# Altium PCB EMI-11-AF-002_IdtMcuV1.PcbDoc (part 1 of 2)
Units mm, origin at the board's own origin, x right, y up, seen from the top; angles counter-clockwise.
Board outline 22 x 20.01 mm, 4 copper layers (Top, Signal 1, Signal 2, Bottom), stack 1.02 mm thick; 56 components, 40 nets, 164 pads, 99 vias.
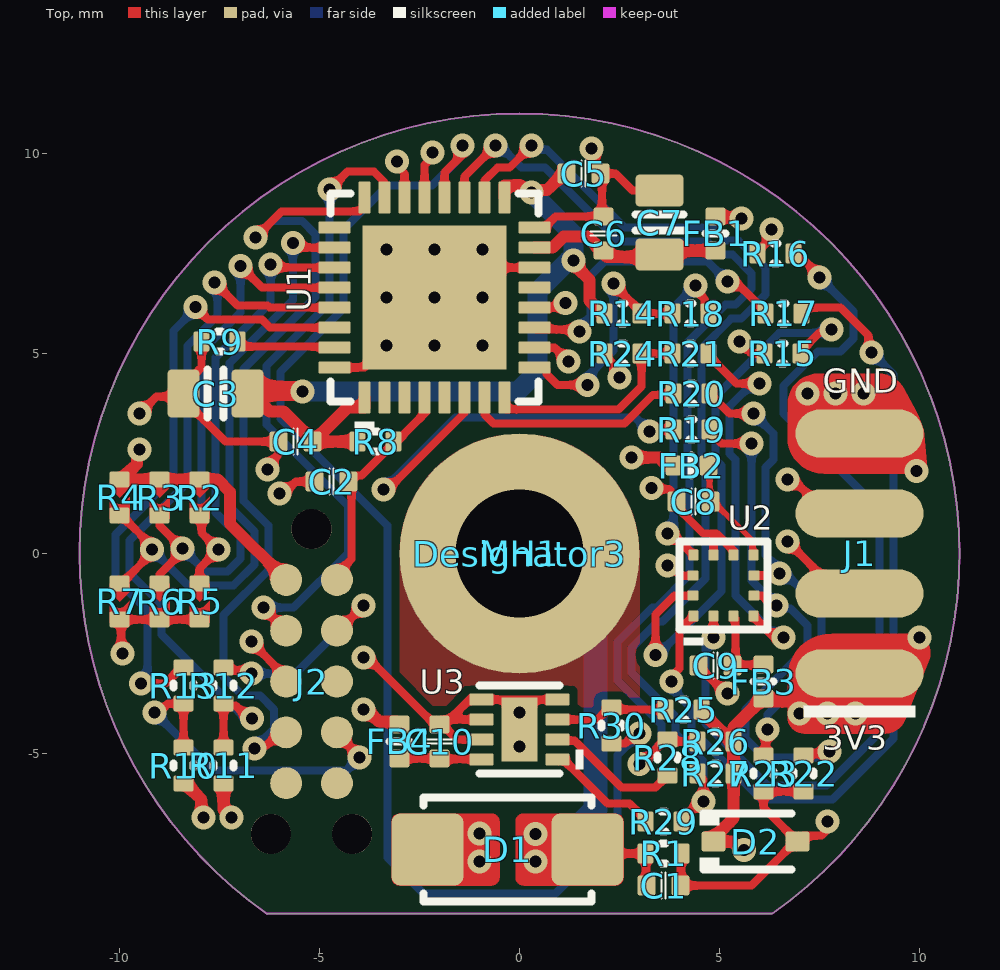
[diagram p0: Top view]
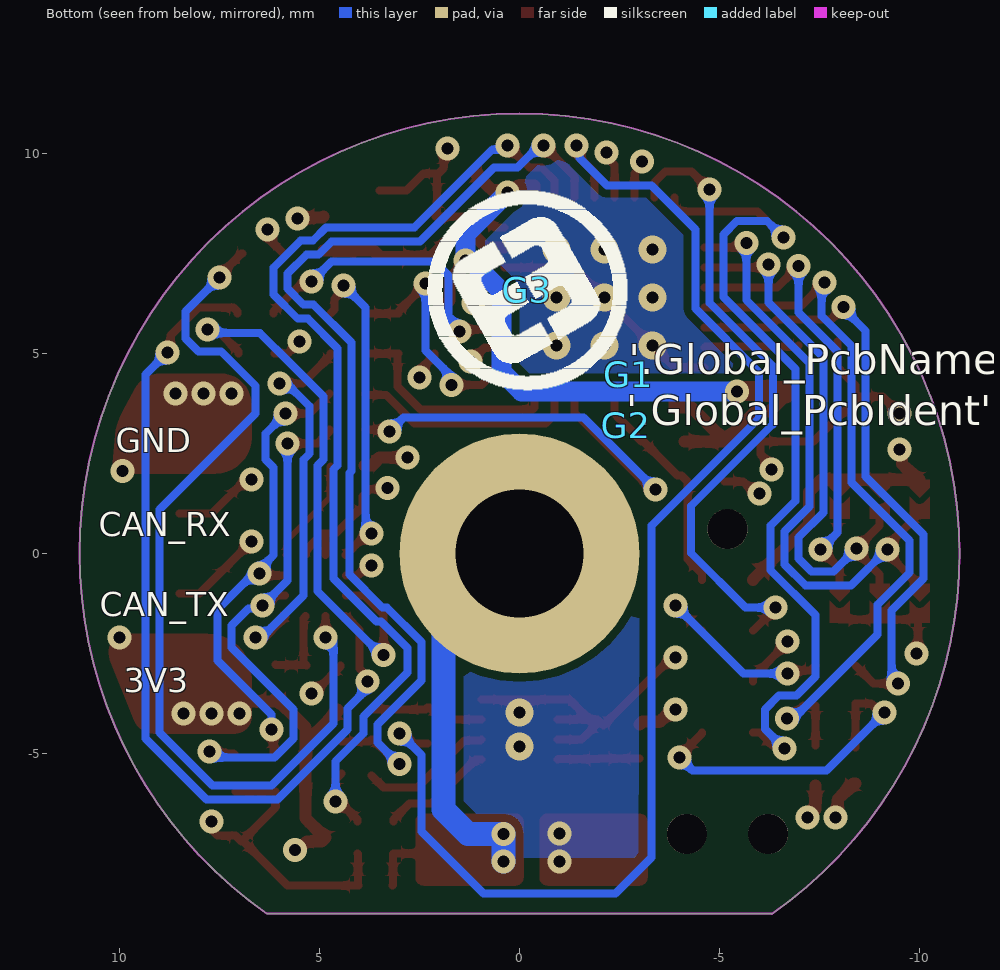
[diagram p1: Bottom view, seen from below]
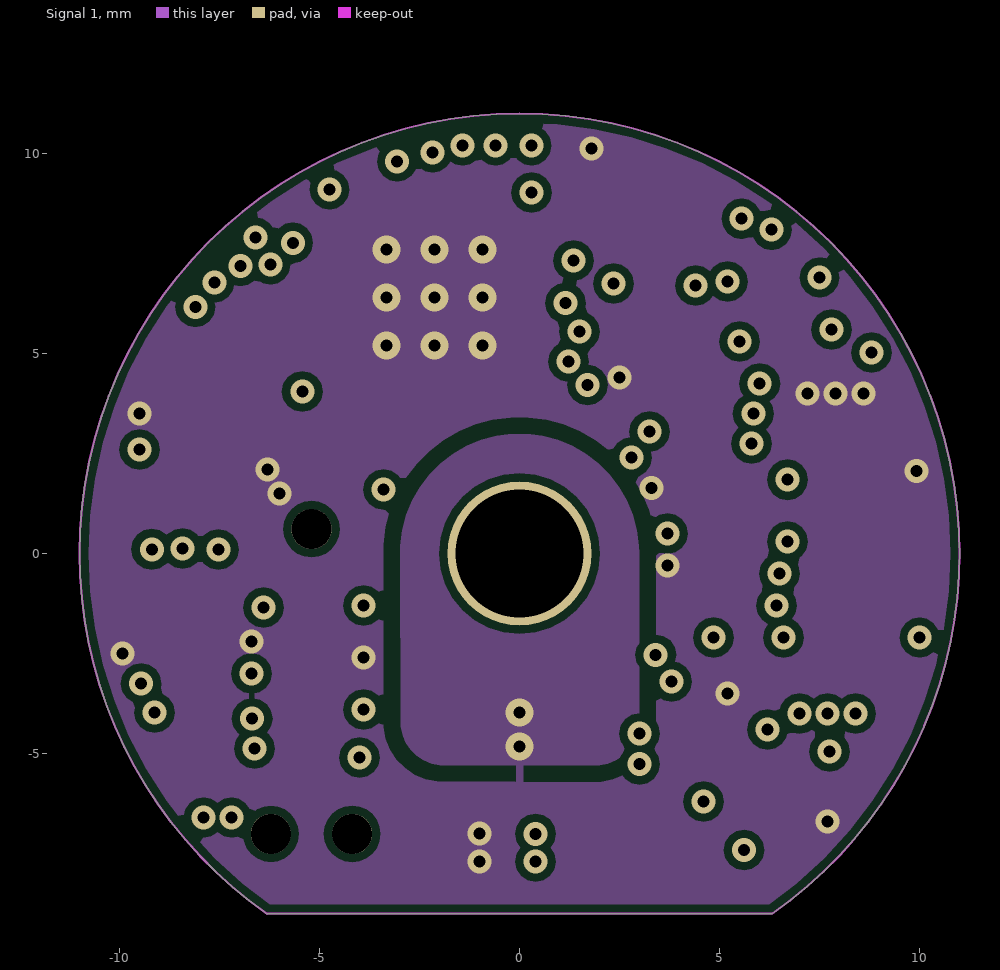
[diagram p2: Signal 1]
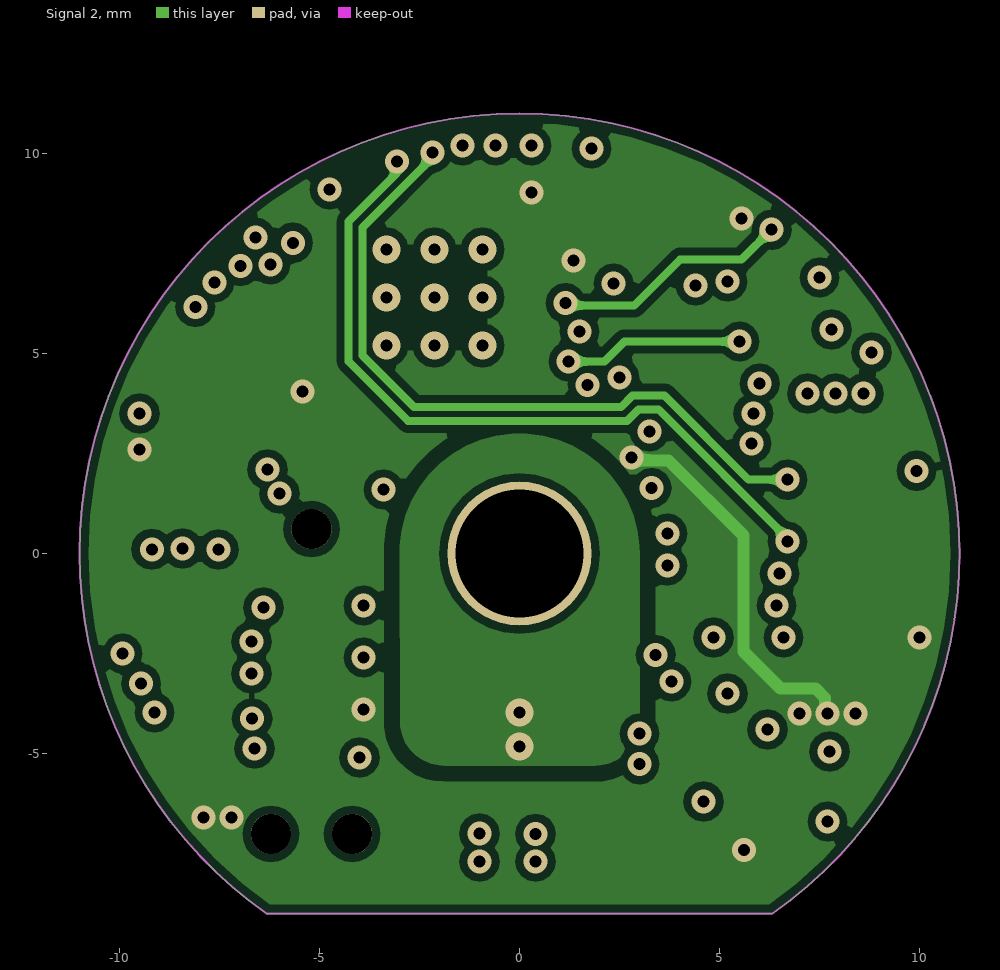
[diagram p3: Signal 2]
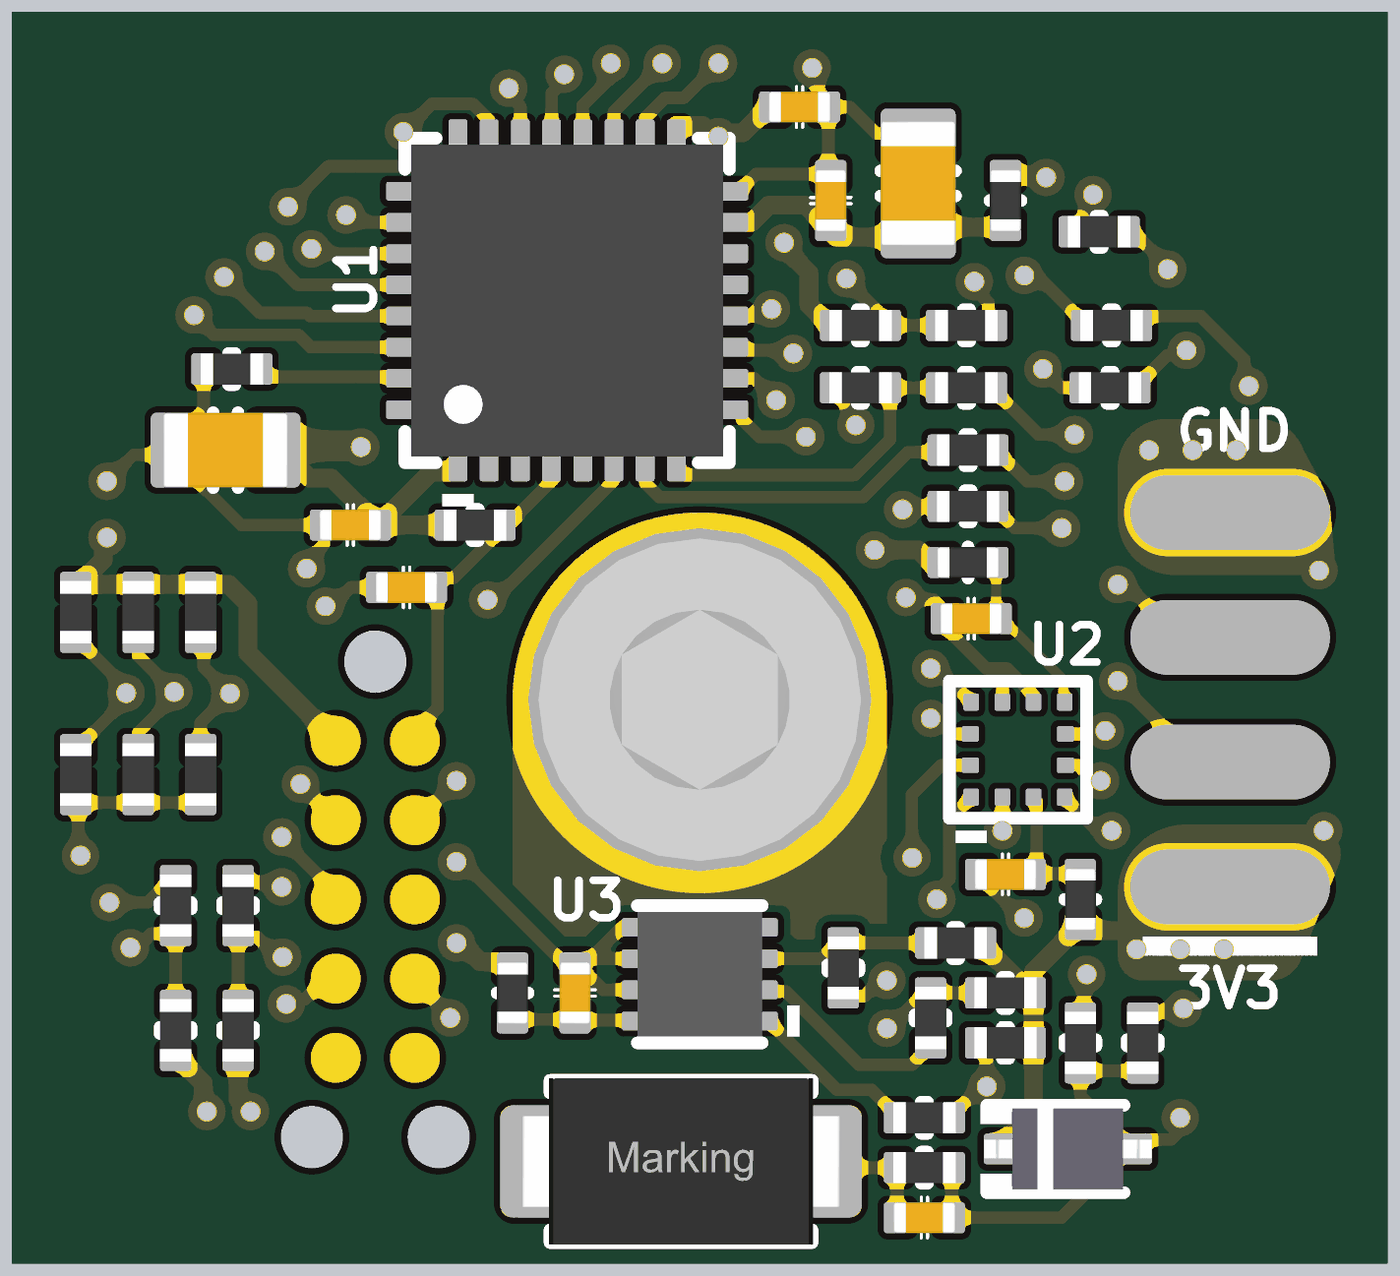
[diagram p4: 3D render of the assembled board from above, using the file's embedded part models]

## Layer stack, top to bottom
Top Solder: solder mask 0.01, Dk 3.5
Top: signal copper 0.035
Dielectric 1: prepreg 0.175, Dk 4.29
Signal 1: signal copper 0.035
Dielectric 2: core 0.53, Dk 3.96
Signal 2: signal copper 0.035
Dielectric 3: prepreg 0.175, Dk 4.29
Bottom: signal copper 0.035
Bottom Solder: solder mask 0.01, Dk 3.5

## Board outline
-11,0 ccw(c0,0) -6.308,-9.012 -6.308,-9 6.324,-9 ccw(c0,0) 11,0 ccw(c0,0)

## Design rules (kind name [scope] priority, off if disabled: settings)
AssemblyTestPointUsage [All] p1 off:
AssemblyTestpoint [All] p1 off: testpointundercomponent=TRUE minsize=1.016 maxsize=2.54 preferedsize=1.524 minholesize=0 maxholesize=1.016 preferedholesize=0.813 testpointgrid=0.025 usegrid=TRUE gridtolerance=0 allowsidetop=TRUE allowsidebottom=TRUE
BoardOutlineClearance [All] p1: gap=0.2 ignorepadtopadclearanceinfootprint=FALSE
Clearance Clearance_Polygon [InPolygon] p1: gap=0.2 ignorepadtopadclearanceinfootprint=FALSE
Clearance [All] p2: gap=0.15 ignorepadtopadclearanceinfootprint=FALSE
ComponentClearance [All] p1 off: gap=0 collisioncheckmode=3 verticalgap=0 showdistances=FALSE
DiffPairsRouting [All] p1: maxlimit=0.15 minlimit=0.15 mostfreqgap=0.15 toplayer_minwidth=0.15 toplayer_maxwidth=0.15 toplayer_prefwidth=0.15 midlayer1_minwidth=0.15 midlayer1_maxwidth=0.15 midlayer1_prefwidth=0.15 midlayer2_minwidth=0.15 midlayer2_maxwidth=0.15 midlayer2_prefwidth=0.15 bottomlayer_minwidth=0.15 bottomlayer_maxwidth=0.15 bottomlayer_prefwidth=0.15 maxuncoupledlength=10
FabricationTestPointUsage [All] p1 off: valid=0 allowmultiple=FALSE
FabricationTestpoint [All] p1 off: side=3 testpointundercomponent=TRUE minsize=1.016 maxsize=2.54 preferedsize=1.524 minholesize=0 maxholesize=1.016 preferedholesize=0.813 testpointgrid=0.025 allowsidetop=TRUE allowsidebottom=TRUE usegrid=TRUE gridtolerance=0
FanoutControl Fanout_BGA [IsBGA] p1 off: bgadir=Out bgaviamode=Centered fanoutstyle=Auto fanoutdirection=Alternating viagrid=0.025 // Fanout_BGA (Default Rule)
FanoutControl Fanout_LCC [IsLCC] p2 off: bgadir=Out bgaviamode=Centered fanoutstyle=Auto fanoutdirection=Alternating viagrid=0.025 // Fanout_LCC (Default Rule)
FanoutControl Fanout_SOIC [IsSOIC] p3 off: bgadir=Out bgaviamode=Centered fanoutstyle=Auto fanoutdirection=Alternating viagrid=0.025 // Fanout_SOIC (Default Rule)
FanoutControl Fanout_Small [(CompPinCount < 5)] p4 off: bgadir=Out bgaviamode=Centered fanoutstyle=Auto fanoutdirection=OutThenIn viagrid=0.025 // Fanout_Small (Default Rule)
FanoutControl Fanout_Default [All] p5 off: bgadir=Out bgaviamode=Centered fanoutstyle=Auto fanoutdirection=Alternating viagrid=0.025 // Fanout_Default (Default Rule)
Height [All] p1 off: minheight=0 maxheight=0 prefheight=0
HoleSize [All] p1: absolutevalues=TRUE maxlimit=100 minlimit=0.3 maxpercent=80.000 minpercent=20.000
HoleToHoleClearance [All] p1: gap=0.3 allowstackedmicrovias=TRUE
MinimumAnnularRing [All] p1: minimumring=0.15
MinimumSolderMaskSliver [All] p1: minsoldermaskwidth=0
PlaneClearance [All] p1: clearance=0.2
PlaneConnect [All] p1: planeconnectstyle=Direct reliefexpansion=0.508 reliefentries=4 reliefconductorwidth=0.254 reliefairgap=0.254
PolygonConnect [All] p1: connectstyle=Direct reliefconductorwidth=0.254 reliefentries=4 polygonreliefangle="90 Angle" airgapwidth=0.254
RoutingCorners [All] p1 off: cornerstyle=45-Degree minsetback=0 maxsetback=0
RoutingVias [All] p1: holewidth=0.3 width=0.6 viastyle="Through Hole" minholewidth=0.3 minwidth=0.6 maxholewidth=0.6 maxwidth=1
SilkToSilkClearance [All] p1: silktosilkclearance=0
SilkToSolderMaskClearance [IsPad] p1: minsilkscreentomaskgap=0 clearancetoexposedcopper=TRUE
SolderMaskExpansion [All] p1: expansion=0.1
Width [All] p1: maxlimit=10 minlimit=0.15 preferedwidth=0.4
10 further rules are at their usual default settings.

## Classes and differential pairs
component class SH2: C8 C9 C10 FB2 FB3 FB4 R14 R15 R16 R17 R18 R19 R20 R21 R22 R23 R24 R25 R26 R27 R28 R29 R30 U2 U3
component class SH1: C2 C3 C4 C5 C6 C7 D2 FB1 J1 J2 R2 R3 R4 R5 R6 R7 R8 R9 R10 R11 R12 R13 U1
component class 0_BlkDiag: C1 D1 G1 G2 G3 MH1 R1

## Components (designator, comment, footprint, x,y, rotation, side; value= is the part's Value field where it differs from the comment)
C1 "CC0402KRX7R9BB103" CAP_0402_L 3.6,-8.3 r180 top
C2 "CC0402KRX7R7BB104" CAP_0402_L -4.7,1.8 r180 top
C3 "CC0805KKX7R6BB106" CAP_0805_L -7.6,4 r180 top
C4 "CC0402KRX7R7BB104" CAP_0402_L -5.6,2.8 r180 top
C5 "CC0402KRX7R7BB104" CAP_0402_L 1.6,9.5 r0 top
C6 "CC0402KRX7R7BB104" CAP_0402_L 2.1,8 r90 top
C7 "CC0805KKX7R6BB106" CAP_0805_L 3.5,8.275 r90 top
C8 "CC0402KRX7R7BB104" CAP_0402_L 4.35,1.299 r180 top
C9 "CC0402KRX7R7BB104" CAP_0402_L 4.9,-2.8 r180 top
C10 "CC0402KRX7R7BB104" CAP_0402_L -2,-4.7 r90 top
D1 "824501301" DIONM510X270_SMA_DO-214AC_L -0.3,-7.4 r0 top
D2 "DDZ3V6ASF-7" SOD170X130_SOD-323_SC-76 5.9,-7.2 r0 top
Designator3 "Comment" MECH-SCR_M3X0.6mm 0,0 r0 top
FB1 "7427927291" BEAD_0402_L 4.9,8 r90 top
FB2 "7427927291" BEAD_0402_L 4.3,2.2 r180 top
FB3 "7427927291" BEAD_0402_L 6.1,-3.2 r270 top
FB4 "7427927291" BEAD_0402_L -3,-4.7 r90 top
G1 "/" GRAPH_PCB_NAME_0.75MM_STROKE -2.733,4.48 r180 bottom
G2 "/" GRAPH_PCB_IDENT_0.75MM_STROKE -2.663,3.213 r180 bottom
G3 "/" GRAPH_EMITTER_5MM -0.194,6.596 r180 bottom
J1 "/" CONN-FLAT_2.00MM_1X4_SMD_320X120 8.5,0 r90 top
J2 "TC2050-NL" CONN-TAG_CONNECT_TC2050-NL -5.2,-3.2 r270 top
MH1 "/" PS-MH_C600H320 0,0 r0 top
R1 "RES 0402" RES_0402_L 3.6,-7.5 r180 top
R2 "RC0402JR-070RL" RES_0402_JP_L -8,1.4 r270 top
R3 "RC0402JR-070RL" RES_0402_JP_L -9,1.4 r270 top
R4 "RC0402JR-070RL" RES_0402_JP_L -10,1.4 r270 top
R5 "RC0402JR-070RL" RES_0402_JP_L -8,-1.2 r270 top
R6 "RC0402JR-070RL" RES_0402_JP_L -9,-1.2 r270 top
R7 "RC0402JR-070RL" RES_0402_JP_L -10,-1.2 r270 top
R8 "RC0402JR-0710KL" RES_0402_L -3.6,2.8 r0 top
R9 "RC0402JR-0710KL" RES_0402_L -7.5,5.3 r180 top
R10 "RC0402JR-0710KL" RES_0402_L -8.4,-5.3 r90 top
R11 "RC0402JR-0710KL" RES_0402_L -7.4,-5.3 r90 top
R12 "RC0402JR-071KL" RES_0402_L -7.4,-3.3 r270 top
R13 "RC0402JR-071KL" RES_0402_L -8.4,-3.3 r90 top
R14 "RC0402JR-0710KL" RES_0402_L 2.575,6 r0 top
R15 "RC0402JR-07100RL" RES_0402_L 6.575,5 r180 top
R16 "RC0402JR-07100RL" RES_0402_L 6.4,7.5 r180 top
R17 "RC0402JR-07100RL" RES_0402_L 6.6,6 r180 top
R18 "RC0402JR-071KL" RES_0402_L 4.275,6 r180 top
R19 "RC0402JR-071KL" RES_0402_L 4.3,3.1 r180 top
R20 "RC0402JR-071KL" RES_0402_L 4.3,4 r180 top
R21 "RC0402JR-071KL" RES_0402_L 4.275,5 r180 top
R22 "RC0402JR-0710KL" RES_0402_L 7.1,-5.5 r270 top
R23 "RC0402JR-0710KL" RES_0402_L 6.1,-5.5 r270 top
R24 "RC0402JR-0710KL" RES_0402_L 2.575,5 r180 top
R25 "RC0402JR-0710KL" RES_0402_L 4.1,-3.9 r180 top
R26 "RC0402JR-071KL" RES_0402_L 4.9,-4.7 r180 top
R27 "RC0402JR-071KL" RES_0402_L 4.9,-5.5 r180 top
R28 "RC0402JR-07100RL" RES_0402_L 3.7,-5.1 r90 top
R29 "RC0402JR-07100RL" RES_0402_L 3.6,-6.7 r0 top
R30 "RC0402JR-071KL" RES_0402_L 2.3,-4.3 r270 top
U1 "STM32G431KBU3" QFN33P50_500X500T360X360 -2.125,6.4 r90 top
U2 "KX132-1211" PQFN12P50_200X200 5.1,-0.8 r90 top
U3 "TMP1075DSGR" SON9P50_200X200T160X90 0,-4.4 r180 top

## Footprints (in the part's own frame and the unit in brackets; to place one, negate y for a bottom-side part, rotate by r counter-clockwise, add the part's x,y. Pads: shape width x height; smd on the part's side, far side on the other; paste and mask are expansions set on the pad)
BEAD_0402_L [mm] "Auralix - GH, 29.04.2021"
  rrect25% 0.45x0.5 smd: 1(-0.425,0) 2(0.425,0)
  Top pour cut-out: 0.3,-0.15 0.3,0.15 0.1,0.35 -0.1,0.35 -0.3,0.15 -0.3,-0.15 -0.1,-0.35 0.1,-0.35
  silkscreen extent 0,-0.25 0,0.25, body extent -0.5,-0.25 0.5,0.25, height 0.5
CAP_0402_L [mm] "Auralix - GH, 29.04.2021"
  rrect25% 0.45x0.5 smd: 1(-0.425,0) 2(0.425,0)
  Top pour cut-out: 0.3,-0.15 0.3,0.15 0.1,0.35 -0.1,0.35 -0.3,0.15 -0.3,-0.15 -0.1,-0.35 0.1,-0.35
  silkscreen extent -0.05,-0.33 0.05,0.33, body extent -0.5,-0.25 0.5,0.25, height 0.5
CAP_0805_L [mm] "RESC2012 - GH, 03.05.2021"
  rrect25% 0.8x1.2 smd: 1(-0.8,0) 2(0.8,0)
  Top pour cut-out: 0.5,-0.5 0.5,0.5 0.3,0.7 -0.3,0.7 -0.5,0.5 -0.5,-0.5 -0.3,-0.7 0.3,-0.7
  silkscreen extent -0.2,-0.6 0.2,0.6, body extent -1,-0.6 1,0.6, height 1.24
CONN-FLAT_2.00MM_1X4_SMD_320X120 [mm] "RRR04200K0030 - GH, 17.03.2021"
  oval 1.2x3.2 smd: 1(-3,0) 2(-1,0) 3(1,0) 4(3,0)
  silkscreen extent -4.1,-1.4 -3.8,1.4
CONN-TAG_CONNECT_TC2050-NL [mm] "TC2050-NL - TV, 23.7.2018"
  round 1 hole 1 unplated paste+0: 0(-3.81,0) 0(3.81,-1.016) 0(3.81,1.016)
  round 0.8 smd paste-10: 1(-2.54,-0.635) 2(-1.27,-0.635) 3(0,-0.635) 4(1.27,-0.635) 5(2.54,-0.635) 6(2.54,0.635) 7(1.27,0.635) 8(0,0.635) 9(-1.27,0.635) 10(-2.54,0.635)
  Top pour cut-out: -3.005,-1.295 3.005,-1.295 3.08,-1.28 3.143,-1.238 3.185,-1.175 3.2,-1.1 3.2,-1.1 3.2,1.1 3.173,1.2 3.1,1.273 3,1.3 3,1.3 -3,1.3 -3.077,1.285 -3.141,1.241 -3.185,1.177 -3.2,1.1 -3.2,1.1 -3.2,-1.1 -3.185,-1.175 -3.143,-1.238 -3.08,-1.28 -3.005,-1.295
DIONM510X270_SMA_DO-214AC_L [mm] "824501301 - GH, 04.05.2021"
  rrect25% 1.8x1.8 smd: 1(-2,0) 2(2,0)
  silkscreen extent -2.1,-1.3 2.1,1.3, body extent -2.56,-1.33 2.56,1.34, height 2.2
GRAPH_EMITTER_5MM [mm] "Emitter - TV, 2.11.2018"
  silkscreen extent -2.5,-2.52 2.5,2.46
GRAPH_PCB_IDENT_0.75MM_STROKE [mm] "Tomaz Vidovic, 16.4.2019"
GRAPH_PCB_NAME_0.75MM_STROKE [mm] "Tomaz Vidovic, 16.4.2019"
MECH-SCR_M3X0.6mm [mm] "MECH-SCR_M3X0.6mm - GH, 18.03.2021"
  body extent -2.75,-2.75 2.75,2.75, height 3
PQFN12P50_200X200 [mm] "KX132-1211 - GH, 20.11.2020"
  rrect25% 0.275x0.25 smd: 1(-0.763,0.75) 2(-0.763,0.25) 3(-0.763,-0.25) 4(-0.763,-0.75) 7(0.763,-0.75) 8(0.763,-0.25) 9(0.763,0.25) 10(0.763,0.75)
  rrect25% 0.25x0.275 smd: 5(-0.25,-0.763) 6(0.25,-0.763) 11(0.25,0.763) 12(-0.25,0.763)
  Top pour cut-out: 1.1,1 1.1,-1 1.087,-1.05 1.05,-1.087 1,-1.1 1,-1.1 -1,-1.1 -1.038,-1.092 -1.071,-1.071 -1.092,-1.038 -1.1,-1 -1.1,-1 -1.1,1 -1.087,1.05 -1.05,1.087 -1,1.1 -1,1.1 1,1.1 1.038,1.092 1.071,1.071 1.092,1.038 1.1,1
  silkscreen extent -1.5,-1.1 1.1,1.1, body extent -1,-1 1,1, height 1.01
PS-MH_C600H320 [mm] "Auralix - GH, 19.03.2021"
  round 6 / inner round 3.6 / far side round 6 hole 3.2: 1(0,0)
QFN33P50_500X500T360X360 [mm] "CC1200 - TV, 26.9.2017"
  rrect25% 0.8x0.3 smd: 1(-2.5,1.75) 2(-2.5,1.25) 3(-2.5,0.75) 4(-2.5,0.25) 5(-2.5,-0.25) 6(-2.5,-0.75) 7(-2.5,-1.25) 8(-2.5,-1.75) 17(2.5,-1.75) 18(2.5,-1.25) 19(2.5,-0.75) 20(2.5,-0.25) 21(2.5,0.25) 22(2.5,0.75) 23(2.5,1.25) 24(2.5,1.75)
  rrect25% 0.3x0.8 smd: 9(-1.75,-2.5) 10(-1.25,-2.5) 11(-0.75,-2.5) 12(-0.25,-2.5) 13(0.25,-2.5) 14(0.75,-2.5) 15(1.25,-2.5) 16(1.75,-2.5) 25(1.75,2.5) 26(1.25,2.5) 27(0.75,2.5) 28(0.25,2.5) 29(-0.25,2.5) 30(-0.75,2.5) 31(-1.25,2.5) 32(-1.75,2.5)
  rect 3.6x3.6 smd: 33(0,0)
  Top pour cut-out: -1.9,-3.1 1.9,-3.1 1.977,-3.085 2.041,-3.041 2.085,-2.977 2.1,-2.9 2.1,-2.9 2.1,-2.3 2.115,-2.223 2.158,-2.159 2.223,-2.115 2.3,-2.1 2.3,-2.1 2.9,-2.1 3,-2.073 3.073,-2 3.1,-1.9 3.1,-1.9 3.1,1.9 3.085,1.977 3.041,2.041 2.976,2.085 2.9,2.1 2.9,2.1 2.3,2.1 2.2,2.127 2.127,2.2 2.1,2.3 2.1,2.3 2.1,2.9 2.085,2.977 2.041,3.041 1.977,3.085 1.9,3.1 1.9,3.1 -1.9,3.1 -1.976,3.085 -2.041,3.041 -2.085,2.977 -2.1,2.9 -2.1,2.9 -2.1,2.3 -2.115,2.223 -2.159,2.159 -2.223,2.115 -2.3,2.1 -2.3,2.1 -2.9,2.1 -3,2.073 -3.073,2 -3.1,1.9 -3.1,1.9 -3.1,-1.9 -3.085,-1.977 -3.041,-2.041 -2.977,-2.085 -2.9,-2.1 -2.9,-2.1 -2.3,-2.1 -2.223,-2.115 -2.159,-2.159 -2.115,-2.224 -2.1,-2.3 -2.1,-2.3 -2.1,-2.5 -1.9,-2.5 -1.9,1.9 1.9,1.9 1.9,-1.9 -1.9,-1.9 -1.9,-2.5 -2.1,-2.5 -2.1,-2.9 -2.085,-2.977 -2.041,-3.041 -1.977,-3.085 -1.9,-3.1
  Top pour cut-out: 6,-0.8
  Top pour cut-out: 5.8,-0.4
  Top pour cut-out: 4.7,-2.3
  silkscreen extent -3.3,-2.6 2.6,2.6, body extent -2.5,-2.5 2.5,2.5, height 1
RES_0402_JP_L [mm] "Auralix - GH, 29.04.2021"
  rrect25% 0.4x0.5 smd: 1(-0.45,0) 2(0.45,0)
  Top region: 0.125,0.1 -0.025,0.25 0.525,0.25 0.525,-0.25 -0.025,-0.25 0.125,-0.1 0.156,-0.054 0.166,0 0.156,0.054 0.125,0.1
  Top region: -0.45,0.25 -0.25,0.25 0,0 -0.25,-0.25 -0.45,-0.25
  Top pour cut-out: 0.3,-0.2 0.3,0.2 0.15,0.35 -0.15,0.35 -0.3,0.2 -0.3,-0.2 -0.15,-0.35 0.15,-0.35
  body extent -0.5,-0.25 0.5,0.25, height 0.35
RES_0402_L [mm] "Auralix - GH, 29.04.2021"
  rrect25% 0.4x0.5 smd: 1(-0.45,0) 2(0.45,0)
  Top pour cut-out: 0.3,-0.2 0.3,0.2 0.15,0.35 -0.15,0.35 -0.3,0.2 -0.3,-0.2 -0.15,-0.35 0.15,-0.35
  silkscreen extent -0.05,-0.25 0.05,0.25, body extent -0.5,-0.25 0.5,0.25, height 0.35
SOD170X130_SOD-323_SC-76 [mm] "BZX384 series SOD323 SC-76, GK, 2.7.2019"
  rrect25% 0.6x0.5 smd: 1(-1.05,0) 2(1.05,0)
  silkscreen extent -1.4,-0.7 0.9,0.7, body extent -1.34,-0.65 1.34,0.65, height 0.94
SON9P50_200X200T160X90 [mm] "TMP1075DSGR - GH, 23.11.2020"
  rrect25% 0.6x0.3 smd: 1(-0.95,0.75) 2(-0.95,0.25) 3(-0.95,-0.25) 4(-0.95,-0.75) 5(0.95,-0.75) 6(0.95,-0.25) 7(0.95,0.25) 8(0.95,0.75)
  rect 0.9x1.6 smd paste-10: 9(0,0)
  Top pour cut-out: -1.3,-1.1 -0.6,-1.1 -0.525,-1.08 -0.47,-1.025 -0.45,-0.95 -0.45,-0.95 -0.45,0.95 -0.461,1.007 -0.494,1.056 -0.543,1.089 -0.6,1.1 -0.6,1.1 -1.3,1.1 -1.357,1.089 -1.406,1.056 -1.439,1.007 -1.45,0.95 -1.45,0.95 -1.45,-0.95 -1.43,-1.025 -1.375,-1.08 -1.3,-1.1
  Top pour cut-out: 0.6,-1.1 1.3,-1.1 1.375,-1.08 1.43,-1.025 1.45,-0.95 1.45,-0.95 1.45,0.95 1.439,1.007 1.406,1.056 1.357,1.089 1.3,1.1 1.3,1.1 0.6,1.1 0.543,1.089 0.494,1.056 0.461,1.007 0.45,0.95 0.45,0.95 0.45,-0.95 0.47,-1.025 0.525,-1.08 0.6,-1.1
  silkscreen extent -1.6,-1.1 1,1.1, body extent -1,-1 1,1, height 0.8

## Part data
C1: library part CAP_0402_10nF_10%_50V_X7R_CC0402KRX7R9BB103, "CAP 0402 10nF 10% 50V X7R", Mfr 1=YAGEO, Mfr 2=/, Temp Max=+125°C, Temp Min=-55°C, zAlternative 1 - Mfr 1=AVX, zAlternative 1 - Mfr No 1=04025C103KAT2A, zAlternative 2 - Mfr 1=KEMET, zAlternative 2 - Mfr No 1=C0402C103K5RACTU, Assembly Service Part Choice=Yes, Assembly Service Provides Material=Yes, Auralix WH=/, Author=GH, Date=30.10.2020, Mfr 3=/, Mfr No 1=CC0402KRX7R9BB103, Mfr No 2=/, Mfr No 3=/, Param 1="10nF 10%", Param 2="50V X7R", Placement=SMD, sArrow 1=/, sArrow 2=/, sArrow 3=/, sDigikey 1=/, sDigikey 2=/, sDigikey 3=/, sFarnell 1=/, sFarnell 2=/, sFarnell 3=/, sMouser 1=/, sMouser 2=/, sMouser 3=/, zAlternative 1 - Mfr 2=/, zAlternative 1 - Mfr No 2=/, zAlternative 2 - Mfr 2=/, zAlternative 2 - Mfr No 2=/, zAlternative 3 - Mfr 1=/, zAlternative 3 - Mfr 2=/, zAlternative 3 - Mfr No 1=/, zAlternative 3 - Mfr No 2=/, zAlternative 4 - Mfr 1=/, zAlternative 4 - Mfr 2=/, zAlternative 4 - Mfr No 1=/, zAlternative 4 - Mfr No 2=/, zAlternative 5 - Mfr 1=/, zAlternative 5 - Mfr 2=/, zAlternative 5 - Mfr No 1=/, zAlternative 5 - Mfr No 2=/, zAlternative 6 - Mfr 1=/, zAlternative 6 - Mfr 2=/, zAlternative 6 - Mfr No 1=/, zAlternative 6 - Mfr No 2=/, zAlternative 7 - Mfr 1=/, zAlternative 7 - Mfr 2=/, zAlternative 7 - Mfr No 1=/, zAlternative 7 - Mfr No 2=/, zAlternative 8 - Mfr 1=/, zAlternative 8 - Mfr 2=/, zAlternative 8 - Mfr No 1=/, zAlternative 8 - Mfr No 2=/, zAlternative 9 - Mfr 1=/, zAlternative 9 - Mfr 2=/, zAlternative 9 - Mfr No 1=/, zAlternative 9 - Mfr No 2=/
C2 C4 C5 C6 C8 C9 C10: library part CAP_0402_100nF_10%_16V_X7R_CC0402KRX7R7BB104, "CAP 0402 100nF 10% 16V X7R", Mfr 1=YAGEO, Mfr 2=/, Temp Max=+125°C, Temp Min=-55°C, zAlternative 1 - Mfr 1=AVX, zAlternative 1 - Mfr No 1=0402YC104KAT2A, zAlternative 2 - Mfr 1=KEMET, zAlternative 2 - Mfr No 1=C0402C104K4RACTU, zAlternative 4 - Mfr 1=MURATA, zAlternative 4 - Mfr No 1=GRM155R71C104JA88D, Assembly Service Part Choice=Yes, Assembly Service Provides Material=Yes, Auralix WH=WH-ID-016, Author=GH, Date=10.8.2020, Mfr 3=/, Mfr No 1=CC0402KRX7R7BB104, Mfr No 2=/, Mfr No 3=/, Param 1="100nF 10%", Param 2="16V X7R", Placement=SMD, sArrow 1=/, sArrow 2=/, sArrow 3=/, sDigikey 1=/, sDigikey 2=/, sDigikey 3=/, sFarnell 1=/, sFarnell 2=/, sFarnell 3=/, sMouser 1=/, sMouser 2=/, sMouser 3=/, zAlternative 1 - Mfr 2=/, zAlternative 1 - Mfr No 2=/, zAlternative 2 - Mfr 2=/, zAlternative 2 - Mfr No 2=/, zAlternative 3 - Mfr 1=/, zAlternative 3 - Mfr 2=/, zAlternative 3 - Mfr No 1=/, zAlternative 3 - Mfr No 2=/, zAlternative 4 - Mfr 2=/, zAlternative 4 - Mfr No 2=/, zAlternative 5 - Mfr 1=/, zAlternative 5 - Mfr 2=/, zAlternative 5 - Mfr No 1=/, zAlternative 5 - Mfr No 2=/, zAlternative 6 - Mfr 1=/, zAlternative 6 - Mfr 2=/, zAlternative 6 - Mfr No 1=/, zAlternative 6 - Mfr No 2=/, zAlternative 7 - Mfr 1=/, zAlternative 7 - Mfr 2=/, zAlternative 7 - Mfr No 1=/, zAlternative 7 - Mfr No 2=/, zAlternative 8 - Mfr 1=/, zAlternative 8 - Mfr 2=/, zAlternative 8 - Mfr No 1=/, zAlternative 8 - Mfr No 2=/, zAlternative 9 - Mfr 1=/, zAlternative 9 - Mfr 2=/, zAlternative 9 - Mfr No 1=/, zAlternative 9 - Mfr No 2=/
C3 C7: library part CAP_0805_10uF_10%_10V_X7R_CC0805KKX7R6BB106, "CAP 0805 10uF 10% 10V X7R", Mfr 1=YAGEO, Mfr 2=/, Temp Max=+125°C, Temp Min=-55°C, zAlternative 1 - Mfr 1=AVX, zAlternative 1 - Mfr No 1=0805ZC106KAT2A, zAlternative 2 - Mfr 1=KEMET, zAlternative 2 - Mfr No 1=C0805C106K8RACTU, Assembly Service Part Choice=Yes, Assembly Service Provides Material=Yes, Auralix WH=/, Author=GH, Date=10.8.2020, Mfr 3=/, Mfr No 1=CC0805KKX7R6BB106, Mfr No 2=/, Mfr No 3=/, Param 1="10uF 10%", Param 2="10V X7R", Placement=SMD, sArrow 1=/, sArrow 2=/, sArrow 3=/, sDigikey 1=/, sDigikey 2=/, sDigikey 3=/, sFarnell 1=/, sFarnell 2=/, sFarnell 3=/, sMouser 1=/, sMouser 2=/, sMouser 3=/, zAlternative 1 - Mfr 2=/, zAlternative 1 - Mfr No 2=/, zAlternative 2 - Mfr 2=/, zAlternative 2 - Mfr No 2=/, zAlternative 3 - Mfr 1=/, zAlternative 3 - Mfr 2=/, zAlternative 3 - Mfr No 1=/, zAlternative 3 - Mfr No 2=/, zAlternative 4 - Mfr 1=/, zAlternative 4 - Mfr 2=/, zAlternative 4 - Mfr No 1=/, zAlternative 4 - Mfr No 2=/, zAlternative 5 - Mfr 1=/, zAlternative 5 - Mfr 2=/, zAlternative 5 - Mfr No 1=/, zAlternative 5 - Mfr No 2=/, zAlternative 6 - Mfr 1=/, zAlternative 6 - Mfr 2=/, zAlternative 6 - Mfr No 1=/, zAlternative 6 - Mfr No 2=/, zAlternative 7 - Mfr 1=/, zAlternative 7 - Mfr 2=/, zAlternative 7 - Mfr No 1=/, zAlternative 7 - Mfr No 2=/, zAlternative 8 - Mfr 1=/, zAlternative 8 - Mfr 2=/, zAlternative 8 - Mfr No 1=/, zAlternative 8 - Mfr No 2=/, zAlternative 9 - Mfr 1=/, zAlternative 9 - Mfr 2=/, zAlternative 9 - Mfr No 1=/, zAlternative 9 - Mfr No 2=/
D1: library part D-TVS-B_30V_400W_824501301, "824501301 - TVS Diode, WE-TVSP Series, Bidirectional, 30 V, 48.4 V, DO-214AC, 2 Pins", Mfr 1="WURTH ELECTRONICS", Mfr 2=/, Temp Max=+150°C, Temp Min=-65°C, Assembly Service Part Choice=No, Assembly Service Provides Material=Yes, Auralix WH=/, Author=TV, Date=7.7.2018, Mfr 3=/, Mfr No 1=824501301, Mfr No 2=/, Mfr No 3=/, Param 1="30V 400W", Param 2=/, Placement=SMD, sArrow 1=/, sArrow 2=/, sArrow 3=/, sDigikey 1=Yes, sDigikey 2=/, sDigikey 3=/, sFarnell 1=Yes, sFarnell 2=/, sFarnell 3=/, sMouser 1=Yes, sMouser 2=/, sMouser 3=/, zAlternative 1 - Mfr 1=/, zAlternative 1 - Mfr 2=/, zAlternative 1 - Mfr No 1=/, zAlternative 1 - Mfr No 2=/, zAlternative 2 - Mfr 1=/, zAlternative 2 - Mfr 2=/, zAlternative 2 - Mfr No 1=/, zAlternative 2 - Mfr No 2=/, zAlternative 3 - Mfr 1=/, zAlternative 3 - Mfr 2=/, zAlternative 3 - Mfr No 1=/, zAlternative 3 - Mfr No 2=/, zAlternative 4 - Mfr 1=/, zAlternative 4 - Mfr 2=/, zAlternative 4 - Mfr No 1=/, zAlternative 4 - Mfr No 2=/, zAlternative 5 - Mfr 1=/, zAlternative 5 - Mfr 2=/, zAlternative 5 - Mfr No 1=/, zAlternative 5 - Mfr No 2=/, zAlternative 6 - Mfr 1=/, zAlternative 6 - Mfr 2=/, zAlternative 6 - Mfr No 1=/, zAlternative 6 - Mfr No 2=/, zAlternative 7 - Mfr 1=/, zAlternative 7 - Mfr 2=/, zAlternative 7 - Mfr No 1=/, zAlternative 7 - Mfr No 2=/, zAlternative 8 - Mfr 1=/, zAlternative 8 - Mfr 2=/, zAlternative 8 - Mfr No 1=/, zAlternative 8 - Mfr No 2=/, zAlternative 9 - Mfr 1=/, zAlternative 9 - Mfr 2=/, zAlternative 9 - Mfr No 1=/, zAlternative 9 - Mfr No 2=/
D2: library part D-Z_3.6V_500mW_DDZ3V6ASF-7, "DDZ3V6ASF-7 - Zener Diodes 500mW 3.57V Zener 500mW 0.9V Vf SOD-323F-2", Mfr 1=DIODES, Mfr 2=/, Temp Max=+150°C, Temp Min=-65°C, zAlternative 1 - Mfr No 1=DDZ3V6BSF-7, Assembly Service Part Choice=No, Assembly Service Provides Material=Yes, Auralix WH=/, Author=GH, Date=16.03.2021, Mfr 3=/, Mfr No 1=DDZ3V6ASF-7, Mfr No 2=/, Mfr No 3=/, Param 1="3.6V 500mW", Param 2=/, Placement=SMD, sArrow 1=Yes, sArrow 2=/, sArrow 3=/, sDigikey 1=Yes, sDigikey 2=/, sDigikey 3=/, sFarnell 1=No, sFarnell 2=/, sFarnell 3=/, sMouser 1=Yes, sMouser 2=/, sMouser 3=/, zAlternative 1 - Mfr 1=DIODES, zAlternative 1 - Mfr 2=/, zAlternative 1 - Mfr No 2=/, zAlternative 2 - Mfr 1=/, zAlternative 2 - Mfr 2=/, zAlternative 2 - Mfr No 1=/, zAlternative 2 - Mfr No 2=/, zAlternative 3 - Mfr 1=/, zAlternative 3 - Mfr 2=/, zAlternative 3 - Mfr No 1=/, zAlternative 3 - Mfr No 2=/, zAlternative 4 - Mfr 1=/, zAlternative 4 - Mfr 2=/, zAlternative 4 - Mfr No 1=/, zAlternative 4 - Mfr No 2=/, zAlternative 5 - Mfr 1=/, zAlternative 5 - Mfr 2=/, zAlternative 5 - Mfr No 1=/, zAlternative 5 - Mfr No 2=/, zAlternative 6 - Mfr 1=/, zAlternative 6 - Mfr 2=/, zAlternative 6 - Mfr No 1=/, zAlternative 6 - Mfr No 2=/, zAlternative 7 - Mfr 1=/, zAlternative 7 - Mfr 2=/, zAlternative 7 - Mfr No 1=/, zAlternative 7 - Mfr No 2=/, zAlternative 8 - Mfr 1=/, zAlternative 8 - Mfr 2=/, zAlternative 8 - Mfr No 1=/, zAlternative 8 - Mfr No 2=/, zAlternative 9 - Mfr 1=/, zAlternative 9 - Mfr 2=/, zAlternative 9 - Mfr No 1=/, zAlternative 9 - Mfr No 2=/
FB1 FB2 FB3 FB4: library part BEAD_0402_600R_300mA_7427927291, "7427927291 - Ferrite Bead, 0402 [1005 Metric], 600 ohm, 300 mA, WE-CBF Series, 0.6 ohm, ± 25%", Mfr 1="WURTH ELECTRONICS", Mfr 2=/, Temp Max=+125°C, Temp Min=-55°C, Assembly Service Part Choice=No, Assembly Service Provides Material=Yes, Auralix WH=/, Author=TV, Date=10.7.2018, Mfr 3=/, Mfr No 1=7427927291, Mfr No 2=/, Mfr No 3=/, Param 1="600R 300mA", Param 2=/, Placement=SMD, sArrow 1=/, sArrow 2=/, sArrow 3=/, sDigikey 1=Yes, sDigikey 2=/, sDigikey 3=/, sFarnell 1=Yes, sFarnell 2=/, sFarnell 3=/, sMouser 1=Yes, sMouser 2=/, sMouser 3=/, zAlternative 1 - Mfr 1=/, zAlternative 1 - Mfr 2=/, zAlternative 1 - Mfr No 1=/, zAlternative 1 - Mfr No 2=/, zAlternative 2 - Mfr 1=/, zAlternative 2 - Mfr 2=/, zAlternative 2 - Mfr No 1=/, zAlternative 2 - Mfr No 2=/, zAlternative 3 - Mfr 1=/, zAlternative 3 - Mfr 2=/, zAlternative 3 - Mfr No 1=/, zAlternative 3 - Mfr No 2=/, zAlternative 4 - Mfr 1=/, zAlternative 4 - Mfr 2=/, zAlternative 4 - Mfr No 1=/, zAlternative 4 - Mfr No 2=/, zAlternative 5 - Mfr 1=/, zAlternative 5 - Mfr 2=/, zAlternative 5 - Mfr No 1=/, zAlternative 5 - Mfr No 2=/, zAlternative 6 - Mfr 1=/, zAlternative 6 - Mfr 2=/, zAlternative 6 - Mfr No 1=/, zAlternative 6 - Mfr No 2=/, zAlternative 7 - Mfr 1=/, zAlternative 7 - Mfr 2=/, zAlternative 7 - Mfr No 1=/, zAlternative 7 - Mfr No 2=/, zAlternative 8 - Mfr 1=/, zAlternative 8 - Mfr 2=/, zAlternative 8 - Mfr No 1=/, zAlternative 8 - Mfr No 2=/, zAlternative 9 - Mfr 1=/, zAlternative 9 - Mfr 2=/, zAlternative 9 - Mfr No 1=/, zAlternative 9 - Mfr No 2=/
G1: library part GRAPH_PCB_NAME_0.75MM_STROKE, Assembly Service Part Choice=/, Assembly Service Provides Material=/, Auralix WH=/, Author=TV, Date=16.4.2019, Mfr 1=/, Mfr 2=/, Mfr 3=/, Mfr No 1=/, Mfr No 2=/, Mfr No 3=/, Param 1="0.75mm Stroke", Param 2=/, Placement=/, sArrow 1=/, sArrow 2=/, sArrow 3=/, sDigikey 1=/, sDigikey 2=/, sDigikey 3=/, sFarnell 1=/, sFarnell 2=/, sFarnell 3=/, sMouser 1=/, sMouser 2=/, sMouser 3=/, Temp Max=/, Temp Min=/, zAlternative 1 - Mfr 1=/, zAlternative 1 - Mfr 2=/, zAlternative 1 - Mfr No 1=/, zAlternative 1 - Mfr No 2=/, zAlternative 2 - Mfr 1=/, zAlternative 2 - Mfr 2=/, zAlternative 2 - Mfr No 1=/, zAlternative 2 - Mfr No 2=/, zAlternative 3 - Mfr 1=/, zAlternative 3 - Mfr 2=/, zAlternative 3 - Mfr No 1=/, zAlternative 3 - Mfr No 2=/, zAlternative 4 - Mfr 1=/, zAlternative 4 - Mfr 2=/, zAlternative 4 - Mfr No 1=/, zAlternative 4 - Mfr No 2=/, zAlternative 5 - Mfr 1=/, zAlternative 5 - Mfr 2=/, zAlternative 5 - Mfr No 1=/, zAlternative 5 - Mfr No 2=/, zAlternative 6 - Mfr 1=/, zAlternative 6 - Mfr 2=/, zAlternative 6 - Mfr No 1=/, zAlternative 6 - Mfr No 2=/, zAlternative 7 - Mfr 1=/, zAlternative 7 - Mfr 2=/, zAlternative 7 - Mfr No 1=/, zAlternative 7 - Mfr No 2=/, zAlternative 8 - Mfr 1=/, zAlternative 8 - Mfr 2=/, zAlternative 8 - Mfr No 1=/, zAlternative 8 - Mfr No 2=/, zAlternative 9 - Mfr 1=/, zAlternative 9 - Mfr 2=/, zAlternative 9 - Mfr No 1=/, zAlternative 9 - Mfr No 2=/
G2: library part GRAPH_PCB_IDENT_0.75MM_STROKE, Assembly Service Part Choice=/, Assembly Service Provides Material=/, Auralix WH=/, Author=TV, Date=16.4.2019, Mfr 1=/, Mfr 2=/, Mfr 3=/, Mfr No 1=/, Mfr No 2=/, Mfr No 3=/, Param 1="0.75mm Stroke", Param 2=/, Placement=/, sArrow 1=/, sArrow 2=/, sArrow 3=/, sDigikey 1=/, sDigikey 2=/, sDigikey 3=/, sFarnell 1=/, sFarnell 2=/, sFarnell 3=/, sMouser 1=/, sMouser 2=/, sMouser 3=/, Temp Max=/, Temp Min=/, zAlternative 1 - Mfr 1=/, zAlternative 1 - Mfr 2=/, zAlternative 1 - Mfr No 1=/, zAlternative 1 - Mfr No 2=/, zAlternative 2 - Mfr 1=/, zAlternative 2 - Mfr 2=/, zAlternative 2 - Mfr No 1=/, zAlternative 2 - Mfr No 2=/, zAlternative 3 - Mfr 1=/, zAlternative 3 - Mfr 2=/, zAlternative 3 - Mfr No 1=/, zAlternative 3 - Mfr No 2=/, zAlternative 4 - Mfr 1=/, zAlternative 4 - Mfr 2=/, zAlternative 4 - Mfr No 1=/, zAlternative 4 - Mfr No 2=/, zAlternative 5 - Mfr 1=/, zAlternative 5 - Mfr 2=/, zAlternative 5 - Mfr No 1=/, zAlternative 5 - Mfr No 2=/, zAlternative 6 - Mfr 1=/, zAlternative 6 - Mfr 2=/, zAlternative 6 - Mfr No 1=/, zAlternative 6 - Mfr No 2=/, zAlternative 7 - Mfr 1=/, zAlternative 7 - Mfr 2=/, zAlternative 7 - Mfr No 1=/, zAlternative 7 - Mfr No 2=/, zAlternative 8 - Mfr 1=/, zAlternative 8 - Mfr 2=/, zAlternative 8 - Mfr No 1=/, zAlternative 8 - Mfr No 2=/, zAlternative 9 - Mfr 1=/, zAlternative 9 - Mfr 2=/, zAlternative 9 - Mfr No 1=/, zAlternative 9 - Mfr No 2=/
G3: library part GRAPH_EMITTER_5MM, Assembly Service Part Choice=/, Assembly Service Provides Material=/, Auralix WH=/, Author=JK, Date=18.4.2019, Mfr 1=/, Mfr 2=/, Mfr 3=/, Mfr No 1=/, Mfr No 2=/, Mfr No 3=/, Param 1=5mm, Param 2=/, Placement=/, sArrow 1=/, sArrow 2=/, sArrow 3=/, sDigikey 1=/, sDigikey 2=/, sDigikey 3=/, sFarnell 1=/, sFarnell 2=/, sFarnell 3=/, sMouser 1=/, sMouser 2=/, sMouser 3=/, Temp Max=/, Temp Min=/, zAlternative 1 - Mfr 1=/, zAlternative 1 - Mfr 2=/, zAlternative 1 - Mfr No 1=/, zAlternative 1 - Mfr No 2=/, zAlternative 2 - Mfr 1=/, zAlternative 2 - Mfr 2=/, zAlternative 2 - Mfr No 1=/, zAlternative 2 - Mfr No 2=/, zAlternative 3 - Mfr 1=/, zAlternative 3 - Mfr 2=/, zAlternative 3 - Mfr No 1=/, zAlternative 3 - Mfr No 2=/, zAlternative 4 - Mfr 1=/, zAlternative 4 - Mfr 2=/, zAlternative 4 - Mfr No 1=/, zAlternative 4 - Mfr No 2=/, zAlternative 5 - Mfr 1=/, zAlternative 5 - Mfr 2=/, zAlternative 5 - Mfr No 1=/, zAlternative 5 - Mfr No 2=/, zAlternative 6 - Mfr 1=/, zAlternative 6 - Mfr 2=/, zAlternative 6 - Mfr No 1=/, zAlternative 6 - Mfr No 2=/, zAlternative 7 - Mfr 1=/, zAlternative 7 - Mfr 2=/, zAlternative 7 - Mfr No 1=/, zAlternative 7 - Mfr No 2=/, zAlternative 8 - Mfr 1=/, zAlternative 8 - Mfr 2=/, zAlternative 8 - Mfr No 1=/, zAlternative 8 - Mfr No 2=/, zAlternative 9 - Mfr 1=/, zAlternative 9 - Mfr 2=/, zAlternative 9 - Mfr No 1=/, zAlternative 9 - Mfr No 2=/
J1: library part CONN-FLAT_2.00MM_1X4_SMD_320X120, "Solder connection 4 pads SMD round flat", Assembly Service Part Choice=/, Assembly Service Provides Material=/, Auralix WH=/, Author=GH, Date=17.03.2021, Mfr 1=/, Mfr 2=/, Mfr 3=/, Mfr No 1=/, Mfr No 2=/, Mfr No 3=/, Param 1=/, Param 2=/, Placement=SMD, sArrow 1=/, sArrow 2=/, sArrow 3=/, sDigikey 1=/, sDigikey 2=/, sDigikey 3=/, sFarnell 1=/, sFarnell 2=/, sFarnell 3=/, sMouser 1=/, sMouser 2=/, sMouser 3=/, Temp Max=/, Temp Min=/, zAlternative 1 - Mfr 1=/, zAlternative 1 - Mfr 2=/, zAlternative 1 - Mfr No 1=/, zAlternative 1 - Mfr No 2=/, zAlternative 2 - Mfr 1=/, zAlternative 2 - Mfr 2=/, zAlternative 2 - Mfr No 1=/, zAlternative 2 - Mfr No 2=/, zAlternative 3 - Mfr 1=/, zAlternative 3 - Mfr 2=/, zAlternative 3 - Mfr No 1=/, zAlternative 3 - Mfr No 2=/, zAlternative 4 - Mfr 1=/, zAlternative 4 - Mfr 2=/, zAlternative 4 - Mfr No 1=/, zAlternative 4 - Mfr No 2=/, zAlternative 5 - Mfr 1=/, zAlternative 5 - Mfr 2=/, zAlternative 5 - Mfr No 1=/, zAlternative 5 - Mfr No 2=/, zAlternative 6 - Mfr 1=/, zAlternative 6 - Mfr 2=/, zAlternative 6 - Mfr No 1=/, zAlternative 6 - Mfr No 2=/, zAlternative 7 - Mfr 1=/, zAlternative 7 - Mfr 2=/, zAlternative 7 - Mfr No 1=/, zAlternative 7 - Mfr No 2=/, zAlternative 8 - Mfr 1=/, zAlternative 8 - Mfr 2=/, zAlternative 8 - Mfr No 1=/, zAlternative 8 - Mfr No 2=/, zAlternative 9 - Mfr 1=/, zAlternative 9 - Mfr 2=/, zAlternative 9 - Mfr No 1=/, zAlternative 9 - Mfr No 2=/
J2: library part CONN-TAG_CONNECT_TC2050-NL_AURALIX, "TC2050-NL - Tag Connect 10 Pin - No Legs - Auralix Pinout", Mfr 1="TAG CONNECT", Mfr 2=/, Assembly Service Part Choice=/, Assembly Service Provides Material=/, Auralix WH=/, Author=TV, Date=23.7.2018, Mfr 3=/, Mfr No 1=TC2050-NL, Mfr No 2=/, Mfr No 3=/, Param 1="Tag-Connect No Legs", Param 2="Auralix Pinout", Placement=/, sArrow 1=/, sArrow 2=/, sArrow 3=/, sDigikey 1=/, sDigikey 2=/, sDigikey 3=/, sFarnell 1=/, sFarnell 2=/, sFarnell 3=/, sMouser 1=/, sMouser 2=/, sMouser 3=/, Temp Max=/, Temp Min=/, zAlternative 1 - Mfr 1=/, zAlternative 1 - Mfr 2=/, zAlternative 1 - Mfr No 1=/, zAlternative 1 - Mfr No 2=/, zAlternative 2 - Mfr 1=/, zAlternative 2 - Mfr 2=/, zAlternative 2 - Mfr No 1=/, zAlternative 2 - Mfr No 2=/, zAlternative 3 - Mfr 1=/, zAlternative 3 - Mfr 2=/, zAlternative 3 - Mfr No 1=/, zAlternative 3 - Mfr No 2=/, zAlternative 4 - Mfr 1=/, zAlternative 4 - Mfr 2=/, zAlternative 4 - Mfr No 1=/, zAlternative 4 - Mfr No 2=/, zAlternative 5 - Mfr 1=/, zAlternative 5 - Mfr 2=/, zAlternative 5 - Mfr No 1=/, zAlternative 5 - Mfr No 2=/, zAlternative 6 - Mfr 1=/, zAlternative 6 - Mfr 2=/, zAlternative 6 - Mfr No 1=/, zAlternative 6 - Mfr No 2=/, zAlternative 7 - Mfr 1=/, zAlternative 7 - Mfr 2=/, zAlternative 7 - Mfr No 1=/, zAlternative 7 - Mfr No 2=/, zAlternative 8 - Mfr 1=/, zAlternative 8 - Mfr 2=/, zAlternative 8 - Mfr No 1=/, zAlternative 8 - Mfr No 2=/, zAlternative 9 - Mfr 1=/, zAlternative 9 - Mfr 2=/, zAlternative 9 - Mfr No 1=/, zAlternative 9 - Mfr No 2=/
MH1: library part PS-MH_C600H320, "Mounting Hole - 6mm/3.2mm", Assembly Service Part Choice=/, Assembly Service Provides Material=/, Auralix WH=/, Author=GH, Date=19.03.2021, Mfr 1=/, Mfr 2=/, Mfr 3=/, Mfr No 1=/, Mfr No 2=/, Mfr No 3=/, Param 1=6mm/3.2mm, Param 2=/, Placement=/, sArrow 1=/, sArrow 2=/, sArrow 3=/, sDigikey 1=/, sDigikey 2=/, sDigikey 3=/, sFarnell 1=/, sFarnell 2=/, sFarnell 3=/, sMouser 1=/, sMouser 2=/, sMouser 3=/, Temp Max=/, Temp Min=/, zAlternative 1 - Mfr 1=/, zAlternative 1 - Mfr 2=/, zAlternative 1 - Mfr No 1=/, zAlternative 1 - Mfr No 2=/, zAlternative 2 - Mfr 1=/, zAlternative 2 - Mfr 2=/, zAlternative 2 - Mfr No 1=/, zAlternative 2 - Mfr No 2=/, zAlternative 3 - Mfr 1=/, zAlternative 3 - Mfr 2=/, zAlternative 3 - Mfr No 1=/, zAlternative 3 - Mfr No 2=/, zAlternative 4 - Mfr 1=/, zAlternative 4 - Mfr 2=/, zAlternative 4 - Mfr No 1=/, zAlternative 4 - Mfr No 2=/, zAlternative 5 - Mfr 1=/, zAlternative 5 - Mfr 2=/, zAlternative 5 - Mfr No 1=/, zAlternative 5 - Mfr No 2=/, zAlternative 6 - Mfr 1=/, zAlternative 6 - Mfr 2=/, zAlternative 6 - Mfr No 1=/, zAlternative 6 - Mfr No 2=/, zAlternative 7 - Mfr 1=/, zAlternative 7 - Mfr 2=/, zAlternative 7 - Mfr No 1=/, zAlternative 7 - Mfr No 2=/, zAlternative 8 - Mfr 1=/, zAlternative 8 - Mfr 2=/, zAlternative 8 - Mfr No 1=/, zAlternative 8 - Mfr No 2=/, zAlternative 9 - Mfr 1=/, zAlternative 9 - Mfr 2=/, zAlternative 9 - Mfr No 1=/, zAlternative 9 - Mfr No 2=/
R1: library part RES_0402, Mfr 1=/, Assembly Service Part Choice=/, Assembly Service Provides Material=/, Auralix WH=/, Author=TV, Date=14.12.2019, Mfr 2=/, Mfr 3=/, Mfr No 1="RES 0402", Mfr No 2=/, Mfr No 3=/, Param 1=0402, Param 2=/, Placement=SMD, sArrow 1=/, sArrow 2=/, sArrow 3=/, sDigikey 1=/, sDigikey 2=/, sDigikey 3=/, sFarnell 1=/, sFarnell 2=/, sFarnell 3=/, sMouser 1=/, sMouser 2=/, sMouser 3=/, Temp Max=/, Temp Min=/, zAlternative 1 - Mfr 1=/, zAlternative 1 - Mfr 2=/, zAlternative 1 - Mfr No 1=/, zAlternative 1 - Mfr No 2=/, zAlternative 2 - Mfr 1=/, zAlternative 2 - Mfr 2=/, zAlternative 2 - Mfr No 1=/, zAlternative 2 - Mfr No 2=/, zAlternative 3 - Mfr 1=/, zAlternative 3 - Mfr 2=/, zAlternative 3 - Mfr No 1=/, zAlternative 3 - Mfr No 2=/, zAlternative 4 - Mfr 1=/, zAlternative 4 - Mfr 2=/, zAlternative 4 - Mfr No 1=/, zAlternative 4 - Mfr No 2=/, zAlternative 5 - Mfr 1=/, zAlternative 5 - Mfr 2=/, zAlternative 5 - Mfr No 1=/, zAlternative 5 - Mfr No 2=/, zAlternative 6 - Mfr 1=/, zAlternative 6 - Mfr 2=/, zAlternative 6 - Mfr No 1=/, zAlternative 6 - Mfr No 2=/, zAlternative 7 - Mfr 1=/, zAlternative 7 - Mfr 2=/, zAlternative 7 - Mfr No 1=/, zAlternative 7 - Mfr No 2=/, zAlternative 8 - Mfr 1=/, zAlternative 8 - Mfr 2=/, zAlternative 8 - Mfr No 1=/, zAlternative 8 - Mfr No 2=/, zAlternative 9 - Mfr 1=/, zAlternative 9 - Mfr 2=/, zAlternative 9 - Mfr No 1=/, zAlternative 9 - Mfr No 2=/
R2 R3 R4 R5 R6 R7: library part RES_0402_0R_5%_1A_RC0402JR-070RL, "RES 0402 0R 5% 1A 63mW 50V", Mfr 1=YAGEO, Mfr 3=/, Mfr No 2=RC0402JR-130RL, Temp Max=+155°C, Temp Min=-55°C, zAlternative 1 - Mfr No 1=RC0402FR-070RL, zAlternative 1 - Mfr No 2=RC0402FR-130RL, zAlternative 2 - Mfr No 1=AC0402JR-070RL, zAlternative 2 - Mfr No 2=AC0402JR-130RL, zAlternative 3 - Mfr No 1=AC0402FR-070RL, zAlternative 3 - Mfr No 2=AC0402FR-130RL, Assembly Service Part Choice=Yes, Assembly Service Provides Material=Yes, Auralix WH=/, Author=GH, Date=10.8.2020, Mfr 2=YAGEO, Mfr No 1=RC0402JR-070RL, Mfr No 3=/, Param 1="0R 1A", Param 2="5% 63mW 50V", Placement=SMD, sArrow 1=/, sArrow 2=/, sArrow 3=/, sDigikey 1=/, sDigikey 2=/, sDigikey 3=/, sFarnell 1=/, sFarnell 2=/, sFarnell 3=/, sMouser 1=/, sMouser 2=/, sMouser 3=/, zAlternative 1 - Mfr 1=YAGEO, zAlternative 1 - Mfr 2=YAGEO, zAlternative 2 - Mfr 1=YAGEO, zAlternative 2 - Mfr 2=YAGEO, zAlternative 3 - Mfr 1=YAGEO, zAlternative 3 - Mfr 2=YAGEO, zAlternative 4 - Mfr 1=/, zAlternative 4 - Mfr 2=/, zAlternative 4 - Mfr No 1=/, zAlternative 4 - Mfr No 2=/, zAlternative 5 - Mfr 1=/, zAlternative 5 - Mfr 2=/, zAlternative 5 - Mfr No 1=/, zAlternative 5 - Mfr No 2=/, zAlternative 6 - Mfr 1=/, zAlternative 6 - Mfr 2=/, zAlternative 6 - Mfr No 1=/, zAlternative 6 - Mfr No 2=/, zAlternative 7 - Mfr 1=/, zAlternative 7 - Mfr 2=/, zAlternative 7 - Mfr No 1=/, zAlternative 7 - Mfr No 2=/, zAlternative 8 - Mfr 1=/, zAlternative 8 - Mfr 2=/, zAlternative 8 - Mfr No 1=/, zAlternative 8 - Mfr No 2=/, zAlternative 9 - Mfr 1=/, zAlternative 9 - Mfr 2=/, zAlternative 9 - Mfr No 1=/, zAlternative 9 - Mfr No 2=/
R8 R9 R10 R11 R14 R22 R23 R24 R25: library part RES_0402_10k_5%_RC0402JR-0710KL, "RES 0402 10k 5% 63mW 50V", Mfr 1=YAGEO, Mfr 3=/, Mfr No 2=RC0402JR-1310KL, Temp Max=+155°C, Temp Min=-55°C, zAlternative 1 - Mfr No 1=RC0402FR-0710KL, zAlternative 1 - Mfr No 2=RC0402FR-1310KL, zAlternative 2 - Mfr No 1=AC0402JR-0710KL, zAlternative 2 - Mfr No 2=AC0402JR-1310KL, zAlternative 3 - Mfr No 1=AC0402FR-0710KL, zAlternative 3 - Mfr No 2=AC0402FR-1310KL, Assembly Service Part Choice=Yes, Assembly Service Provides Material=Yes, Auralix WH=/, Author=GH, Date=10.8.2020, Mfr 2=YAGEO, Mfr No 1=RC0402JR-0710KL, Mfr No 3=/, Param 1="10k 5%", Param 2="63mW 50V", Placement=SMD, sArrow 1=/, sArrow 2=/, sArrow 3=/, sDigikey 1=/, sDigikey 2=/, sDigikey 3=/, sFarnell 1=/, sFarnell 2=/, sFarnell 3=/, sMouser 1=/, sMouser 2=/, sMouser 3=/, zAlternative 1 - Mfr 1=YAGEO, zAlternative 1 - Mfr 2=YAGEO, zAlternative 2 - Mfr 1=YAGEO, zAlternative 2 - Mfr 2=YAGEO, zAlternative 3 - Mfr 1=YAGEO, zAlternative 3 - Mfr 2=YAGEO, zAlternative 4 - Mfr 1=/, zAlternative 4 - Mfr 2=/, zAlternative 4 - Mfr No 1=/, zAlternative 4 - Mfr No 2=/, zAlternative 5 - Mfr 1=/, zAlternative 5 - Mfr 2=/, zAlternative 5 - Mfr No 1=/, zAlternative 5 - Mfr No 2=/, zAlternative 6 - Mfr 1=/, zAlternative 6 - Mfr 2=/, zAlternative 6 - Mfr No 1=/, zAlternative 6 - Mfr No 2=/, zAlternative 7 - Mfr 1=/, zAlternative 7 - Mfr 2=/, zAlternative 7 - Mfr No 1=/, zAlternative 7 - Mfr No 2=/, zAlternative 8 - Mfr 1=/, zAlternative 8 - Mfr 2=/, zAlternative 8 - Mfr No 1=/, zAlternative 8 - Mfr No 2=/, zAlternative 9 - Mfr 1=/, zAlternative 9 - Mfr 2=/, zAlternative 9 - Mfr No 1=/, zAlternative 9 - Mfr No 2=/
R12 R13 R18 R19 R20 R21 R26 R27 R30: library part RES_0402_1k_5%_RC0402JR-071KL, "RES 0402 1k 5% 63mW 50V", Mfr 1=YAGEO, Mfr 3=/, Mfr No 2=RC0402JR-131KL, Temp Max=+155°C, Temp Min=-55°C, zAlternative 1 - Mfr No 1=RC0402FR-071KL, zAlternative 1 - Mfr No 2=RC0402FR-131KL, zAlternative 2 - Mfr No 1=AC0402JR-071KL, zAlternative 2 - Mfr No 2=AC0402JR-131KL, zAlternative 3 - Mfr No 1=AC0402FR-071KL, zAlternative 3 - Mfr No 2=AC0402FR-131KL, Assembly Service Part Choice=Yes, Assembly Service Provides Material=Yes, Auralix WH=/, Author=GH, Date=10.8.2020, Mfr 2=YAGEO, Mfr No 1=RC0402JR-071KL, Mfr No 3=/, Param 1="1k 5%", Param 2="63mW 50V", Placement=SMD, sArrow 1=/, sArrow 2=/, sArrow 3=/, sDigikey 1=/, sDigikey 2=/, sDigikey 3=/, sFarnell 1=/, sFarnell 2=/, sFarnell 3=/, sMouser 1=/, sMouser 2=/, sMouser 3=/, zAlternative 1 - Mfr 1=YAGEO, zAlternative 1 - Mfr 2=YAGEO, zAlternative 2 - Mfr 1=YAGEO, zAlternative 2 - Mfr 2=YAGEO, zAlternative 3 - Mfr 1=YAGEO, zAlternative 3 - Mfr 2=YAGEO, zAlternative 4 - Mfr 1=/, zAlternative 4 - Mfr 2=/, zAlternative 4 - Mfr No 1=/, zAlternative 4 - Mfr No 2=/, zAlternative 5 - Mfr 1=/, zAlternative 5 - Mfr 2=/, zAlternative 5 - Mfr No 1=/, zAlternative 5 - Mfr No 2=/, zAlternative 6 - Mfr 1=/, zAlternative 6 - Mfr 2=/, zAlternative 6 - Mfr No 1=/, zAlternative 6 - Mfr No 2=/, zAlternative 7 - Mfr 1=/, zAlternative 7 - Mfr 2=/, zAlternative 7 - Mfr No 1=/, zAlternative 7 - Mfr No 2=/, zAlternative 8 - Mfr 1=/, zAlternative 8 - Mfr 2=/, zAlternative 8 - Mfr No 1=/, zAlternative 8 - Mfr No 2=/, zAlternative 9 - Mfr 1=/, zAlternative 9 - Mfr 2=/, zAlternative 9 - Mfr No 1=/, zAlternative 9 - Mfr No 2=/
R15 R16 R17 R28 R29: library part "RES_0402_100R_5% _RC0402JR-07100RL", "RES 0402 100R 5% 63mW 50V", Mfr 1=YAGEO, Mfr 3=/, Mfr No 2=RC0402JR-13100RL, Temp Max=+155°C, Temp Min=-55°C, zAlternative 1 - Mfr No 1=RC0402FR-07100RL, zAlternative 1 - Mfr No 2=RC0402FR-13100RL, zAlternative 2 - Mfr No 1=AC0402JR-07100RL, zAlternative 2 - Mfr No 2=AC0402JR-13100RL, zAlternative 3 - Mfr No 1=AC0402FR-07100RL, zAlternative 3 - Mfr No 2=AC0402FR-13100RL, Assembly Service Part Choice=Yes, Assembly Service Provides Material=Yes, Auralix WH=/, Author=GH, Date=10.8.2020, Mfr 2=YAGEO, Mfr No 1=RC0402JR-07100RL, Mfr No 3=/, Param 1="100R 5%", Param 2="63mW 50V", Placement=SMD, sArrow 1=/, sArrow 2=/, sArrow 3=/, sDigikey 1=/, sDigikey 2=/, sDigikey 3=/, sFarnell 1=/, sFarnell 2=/, sFarnell 3=/, sMouser 1=/, sMouser 2=/, sMouser 3=/, zAlternative 1 - Mfr 1=YAGEO, zAlternative 1 - Mfr 2=YAGEO, zAlternative 2 - Mfr 1=YAGEO, zAlternative 2 - Mfr 2=YAGEO, zAlternative 3 - Mfr 1=YAGEO, zAlternative 3 - Mfr 2=YAGEO, zAlternative 4 - Mfr 1=/, zAlternative 4 - Mfr 2=/, zAlternative 4 - Mfr No 1=/, zAlternative 4 - Mfr No 2=/, zAlternative 5 - Mfr 1=/, zAlternative 5 - Mfr 2=/, zAlternative 5 - Mfr No 1=/, zAlternative 5 - Mfr No 2=/, zAlternative 6 - Mfr 1=/, zAlternative 6 - Mfr 2=/, zAlternative 6 - Mfr No 1=/, zAlternative 6 - Mfr No 2=/, zAlternative 7 - Mfr 1=/, zAlternative 7 - Mfr 2=/, zAlternative 7 - Mfr No 1=/, zAlternative 7 - Mfr No 2=/, zAlternative 8 - Mfr 1=/, zAlternative 8 - Mfr 2=/, zAlternative 8 - Mfr No 1=/, zAlternative 8 - Mfr No 2=/, zAlternative 9 - Mfr 1=/, zAlternative 9 - Mfr 2=/, zAlternative 9 - Mfr No 1=/, zAlternative 9 - Mfr No 2=/
U1: library part IC-MCU_STM32G431KBU3, "STM32G431KBU3 - ARM MCU, STM32 Family STM32G4 Series Microcontrollers, ARM Cortex-M4F, 32bit, 170 MHz, 128 KB", Mfr 1=STMICROELECTRONICS, Mfr 2=/, Temp Max=+125°C, Temp Min=-40°C, Assembly Service Part Choice=No, Assembly Service Provides Material=Yes, Auralix WH=/, Author=GH, Date=20.11.2020, Mfr 3=/, Mfr No 1=STM32G431KBU3, Mfr No 2=/, Mfr No 3=/, Param 1=/, Param 2=/, Placement=SMD, sArrow 1=/, sArrow 2=/, sArrow 3=/, sDigikey 1=Yes, sDigikey 2=/, sDigikey 3=/, sFarnell 1=Yes, sFarnell 2=/, sFarnell 3=/, sMouser 1=Yes, sMouser 2=/, sMouser 3=/, zAlternative 1 - Mfr 1=/, zAlternative 1 - Mfr 2=/, zAlternative 1 - Mfr No 1=/, zAlternative 1 - Mfr No 2=/, zAlternative 2 - Mfr 1=/, zAlternative 2 - Mfr 2=/, zAlternative 2 - Mfr No 1=/, zAlternative 2 - Mfr No 2=/, zAlternative 3 - Mfr 1=/, zAlternative 3 - Mfr 2=/, zAlternative 3 - Mfr No 1=/, zAlternative 3 - Mfr No 2=/, zAlternative 4 - Mfr 1=/, zAlternative 4 - Mfr 2=/, zAlternative 4 - Mfr No 1=/, zAlternative 4 - Mfr No 2=/, zAlternative 5 - Mfr 1=/, zAlternative 5 - Mfr 2=/, zAlternative 5 - Mfr No 1=/, zAlternative 5 - Mfr No 2=/, zAlternative 6 - Mfr 1=/, zAlternative 6 - Mfr 2=/, zAlternative 6 - Mfr No 1=/, zAlternative 6 - Mfr No 2=/, zAlternative 7 - Mfr 1=/, zAlternative 7 - Mfr 2=/, zAlternative 7 - Mfr No 1=/, zAlternative 7 - Mfr No 2=/, zAlternative 8 - Mfr 1=/, zAlternative 8 - Mfr 2=/, zAlternative 8 - Mfr No 1=/, zAlternative 8 - Mfr No 2=/, zAlternative 9 - Mfr 1=/, zAlternative 9 - Mfr 2=/, zAlternative 9 - Mfr No 1=/, zAlternative 9 - Mfr No 2=/
U2: library part IC_KX132-1211, "KX132-1211 -  MEMS Accelerometer, 3-Axis, Digital, X, Y, Z, ± 2g, ± 4g, ± 8g, ± 16g, 1.7 V, 3.6 V, LGA-12", Mfr 1=ROHM, Mfr 2=/, Temp Max=+105°C, Temp Min=-40°C, Assembly Service Part Choice=No, Assembly Service Provides Material=Yes, Auralix WH=/, Author=GH, Date=20.11.2020, Mfr 3=/, Mfr No 1=KX132-1211, Mfr No 2=/, Mfr No 3=/, Param 1=/, Param 2=/, Placement=SMD, sArrow 1=/, sArrow 2=/, sArrow 3=/, sDigikey 1=Yes, sDigikey 2=/, sDigikey 3=/, sFarnell 1=Yes, sFarnell 2=/, sFarnell 3=/, sMouser 1=Yes, sMouser 2=/, sMouser 3=/, zAlternative 1 - Mfr 1=/, zAlternative 1 - Mfr 2=/, zAlternative 1 - Mfr No 1=/, zAlternative 1 - Mfr No 2=/, zAlternative 2 - Mfr 1=/, zAlternative 2 - Mfr 2=/, zAlternative 2 - Mfr No 1=/, zAlternative 2 - Mfr No 2=/, zAlternative 3 - Mfr 1=/, zAlternative 3 - Mfr 2=/, zAlternative 3 - Mfr No 1=/, zAlternative 3 - Mfr No 2=/, zAlternative 4 - Mfr 1=/, zAlternative 4 - Mfr 2=/, zAlternative 4 - Mfr No 1=/, zAlternative 4 - Mfr No 2=/, zAlternative 5 - Mfr 1=/, zAlternative 5 - Mfr 2=/, zAlternative 5 - Mfr No 1=/, zAlternative 5 - Mfr No 2=/, zAlternative 6 - Mfr 1=/, zAlternative 6 - Mfr 2=/, zAlternative 6 - Mfr No 1=/, zAlternative 6 - Mfr No 2=/, zAlternative 7 - Mfr 1=/, zAlternative 7 - Mfr 2=/, zAlternative 7 - Mfr No 1=/, zAlternative 7 - Mfr No 2=/, zAlternative 8 - Mfr 1=/, zAlternative 8 - Mfr 2=/, zAlternative 8 - Mfr No 1=/, zAlternative 8 - Mfr No 2=/, zAlternative 9 - Mfr 1=/, zAlternative 9 - Mfr 2=/, zAlternative 9 - Mfr No 1=/, zAlternative 9 - Mfr No 2=/
U3: library part IC_TMP1075DSGR, "TMP1075DSGR -  Board Mount Temperature Sensor Digital, Local -55°C ~ 125°C 12 b 8-WSON (2x2)", Mfr 1="TEXAS INSTRUMENTS", Mfr 3=/, Mfr No 2=TMP1075DSGT, Temp Max=+125°C, Temp Min=-55°C, Assembly Service Part Choice=No, Assembly Service Provides Material=Yes, Auralix WH=/, Author=GH, Date=23.11.2020, Mfr 2="TEXAS INSTRUMENTS", Mfr No 1=TMP1075DSGR, Mfr No 3=/, Param 1=/, Param 2=/, Placement=SMD, sArrow 1=/, sArrow 2=/, sArrow 3=/, sDigikey 1=Yes, sDigikey 2=Yes, sDigikey 3=/, sFarnell 1=No, sFarnell 2=No, sFarnell 3=/, sMouser 1=Yes, sMouser 2=Yes, sMouser 3=/, zAlternative 1 - Mfr 1=/, zAlternative 1 - Mfr 2=/, zAlternative 1 - Mfr No 1=/, zAlternative 1 - Mfr No 2=/, zAlternative 2 - Mfr 1=/, zAlternative 2 - Mfr 2=/, zAlternative 2 - Mfr No 1=/, zAlternative 2 - Mfr No 2=/, zAlternative 3 - Mfr 1=/, zAlternative 3 - Mfr 2=/, zAlternative 3 - Mfr No 1=/, zAlternative 3 - Mfr No 2=/, zAlternative 4 - Mfr 1=/, zAlternative 4 - Mfr 2=/, zAlternative 4 - Mfr No 1=/, zAlternative 4 - Mfr No 2=/, zAlternative 5 - Mfr 1=/, zAlternative 5 - Mfr 2=/, zAlternative 5 - Mfr No 1=/, zAlternative 5 - Mfr No 2=/, zAlternative 6 - Mfr 1=/, zAlternative 6 - Mfr 2=/, zAlternative 6 - Mfr No 1=/, zAlternative 6 - Mfr No 2=/, zAlternative 7 - Mfr 1=/, zAlternative 7 - Mfr 2=/, zAlternative 7 - Mfr No 1=/, zAlternative 7 - Mfr No 2=/, zAlternative 8 - Mfr 1=/, zAlternative 8 - Mfr 2=/, zAlternative 8 - Mfr No 1=/, zAlternative 8 - Mfr No 2=/, zAlternative 9 - Mfr 1=/, zAlternative 9 - Mfr 2=/, zAlternative 9 - Mfr No 1=/, zAlternative 9 - Mfr No 2=/

## Via types
v1: diameter 0.6, hole 0.3, Top to Bottom, tented both sides, 88 vias
v2: diameter 0.7, hole 0.3, Top to Bottom, tented bottom, 9 vias
v3: diameter 0.7, hole 0.3, Top to Bottom, tented both sides, 2 vias

## Nets (pads, with @x,y where several pads share a name; then routed paths per layer and width w, separated by ;. In a path a pad name is that pad's centre, name@x,y a point inside that pad or via, vN(x,y) a via of type N, cw(c..) or ccw(c..) an arc to the next point about the centre after c; other vN are vias at no path point)
3V3: C3.1 C4.1 C5.1 D2.1 FB1.2 FB2.2 FB3.2 FB4.2 J1.1 J2.1 R2.1 R3.1 R4.1 R8.1 R10.1 R11.1 R14.1 R25.1 R26.1 R27.1 U1.1 U1.17 | length 49.5
  Top w0.3: R4.1 R4.1@-9.95,1.85 ; v1(-9.5,2.6) -9.557,2.543 -9.557,2.243 R4.1@-9.95,1.85 ; R10.1 -8.35,-5.75 -7.957,-6.143 -7.957,-6.543 v1(-7.9,-6.6) ; R11.1@-7.4,-5.8 -7.4,-6.4 v1(-7.2,-6.6) ; C3.1@-6.65,4 -6.65,3.95 -6.25,3.55 -5.9,3.55 C4.1@-5.15,2.8 ; J2.1 -7.243,0.747 -7.243,1.078 -7.243,1.543 -7.55,1.85 R2.1 R3.1 R4.1@-9.95,1.85 ; R8.1@-4.125,2.8 C4.1@-5.15,2.8 ; v1(-3.9,-3.9) -3.819,-3.9 -3.519,-4.2 -3.075,-4.2 FB4.2 ; U1.1 -3.875,3.65 -4.3,3.65 C4.1@-5.15,2.8 ; U1.17 -0.375,9.207 0.037,9.207 0.219,9.025 v1(0.3,9.025) 0.357,9.082 0.682,9.082 C5.1@1.1,9.5 ; v1(1.35,7.324) 1.35,7.243 1.75,6.843 1.75,6.501 1.75,6.325 R14.1@2.075,6 ; v1(2.8,2.4) 3.5,2.4 3.705,2.195 3.87,2.195 FB2.2 ; R25.1 4.55,-3.95 R26.1@5.35,-4.75 ; FB1.2 4.927,8.398 5.523,8.398 v1(5.55,8.371) ; v1(5.613,-7.412) 5.531,-7.412 5.319,-7.2 4.95,-7.2 4.85,-7.1 4.864,-7.1 5.35,-6.614 R27.1 R26.1@5.35,-4.75 ; FB3.2@6.075,-3.625 5.35,-4.35 R26.1 R26.1@5.35,-4.75 ; FB3.2 6.175,-3.7 7,-3.7 v1(7,-4)
  Top w0.5: C3.1@-6.65,4 -6.581,4.069 v1@-5.45,4.069
  Signal 2 w0.3: v1(2.8,2.4) 2.869,2.331 3.719,2.331 5.6,0.45 5.6,-2.45 6.525,-3.375 7.402,-3.375 7.643,-3.616 7.643,-3.943 v1(7.7,-4)
  Bottom w0.5: v1(-5.431,4.05) -0.05,4.05 0.45,4.55 0.45,6.551 1.224,7.324 v1(1.35,7.324) 1.35,7.975 v1(0.3,9.025)
  other v1: 8.4,-4 10,-2.1
ACC_INT1: R19.2 U1.6 | length 11.4
  Top w0.2: v1(-3.4,1.6) -3.347,1.547 -1.375,3.518 U1.6 ; v1(3.251,3.05) 3.3,3.1 R19.2
  Bottom w0.2: v1(-3.4,1.6) -1.601,3.399 2.901,3.399 v1(3.251,3.05)
ACC_INT2: R20.2 U1.7 | length 5.6
  Top w0.2: U1.7 -0.875,3.475 -0.65,3.25 2.623,3.25 3.34,3.968 3.85,3.968 R20.2
ACC_nCS: R14.2 R18.2 U1.9 | length 6.2
  Top w0.2: U1.9 0.625,4.65 0.675,4.6 0.675,4.489 0.95,4.214 v1(1.7,4.214) ; v1(2.35,6.75) 2.35,6.725 3.025,6.05 R14.2 R18.2
  Bottom w0.2: v1(1.7,4.214) 1.775,4.289 1.775,4.5 2.35,5.075 v1(2.35,6.75)
ACC_TRIG: R21.2 R24.1 U1.8 | length 5.6
  Top w0.2: U1.8 -0.375,3.65 -0.325,3.6 2.478,3.6 3.05,4.172 3.05,4.975 R24.1 R21.2
CAN.RX: J1.3 U1.21 | length 21.3
  Top w0.2: U1.21 -2.375,9.717 -2.175,9.917 v1(-2.175,10.025) ; v1(6.7,1.846) 6.846,1.846 7.692,1 J1.3
  Signal 2 w0.2: v1(-2.175,10.025) -2.175,9.903 -3.925,8.153 -3.925,4.951 -2.638,3.664 2.542,3.664 2.828,3.95 3.623,3.95 5.728,1.846 v1(6.7,1.846)
CAN.TX: J1.2 U1.22 | length 22.6
  Top w0.2: v1(-3.061,9.8) -3.061,9.692 -2.875,9.506 U1.22 ; v1(6.7,0.3) J1.2@8,-1 ; J1.2@7.55,-0.55 J1.2@8,-1 ; J1.2 J1.2@8,-1
  Signal 2 w0.2: v1(-3.061,9.8) -3.061,9.512 -4.275,8.298 -4.275,4.807 -2.783,3.314 2.687,3.314 2.973,3.6 3.478,3.6 6.7,0.379 v1(6.7,0.3)
DBG_UART.RX: R13.2 U1.30 | length 15.6
  Top w0.2: v1(-9.461,-3.25) -8.85,-3.25 R13.2@-8.4,-2.8 ; v1(-8.105,6.165) -7.789,5.85 -6.44,5.85 -6.24,5.65 U1.30
  Bottom w0.2: v1(-9.461,-3.25) -9.3,-3.089 -9.3,-1.425 -10.1,-0.625 -10.1,0.473 -8.65,1.923 -8.65,5.569 -8.105,6.114 v1(-8.105,6.165)
DBG_UART.TX: R11.2 R12.2 U1.29 | length 18.3
  Top w0.2: v1(-7.625,6.775) -7.05,6.2 -6.338,6.2 ; R11.2@-7.4,-4.8 -7.4,-3.8 -7.1,-3.8 -6.775,-4.125 v1(-6.685,-4.125) ; -6.338,6.2 -6.296,6.2 -6.246,6.15 U1.29
  Bottom w0.2: v1(-7.625,6.775) -7.55,6.7 -7.55,5.943 -8.3,5.193 -8.3,1.778 -9.75,0.328 -9.75,-0.48 -8.95,-1.28 -8.95,-2.023 -6.848,-4.125 v1(-6.685,-4.125)
GND: C1.1 C2.2 C3.2 C4.2 C5.2 C6.2 C7.2 C8.2 C9.2 C10.2 D1.1 D2.2 J1.4 J2.3 R1.1 R5.2 R6.2 R7.2 R9.2 R22.2 R23.2 R24.2 U1.14 U1.16 U1.32 U1.33 U2.8 U2.9 U2.11 U3.4 U3.5 U3.6 U3.7 U3.9 | length 45